# Altium PCB VariablePWMDriverPCB.PcbDoc
Units mm, origin at the board's own origin, x right, y up, seen from the top; angles counter-clockwise.
Board outline 22 x 22 mm, 2 copper layers (Top Layer, Bottom Layer); 8 components, 8 nets, 23 pads, 0 vias.
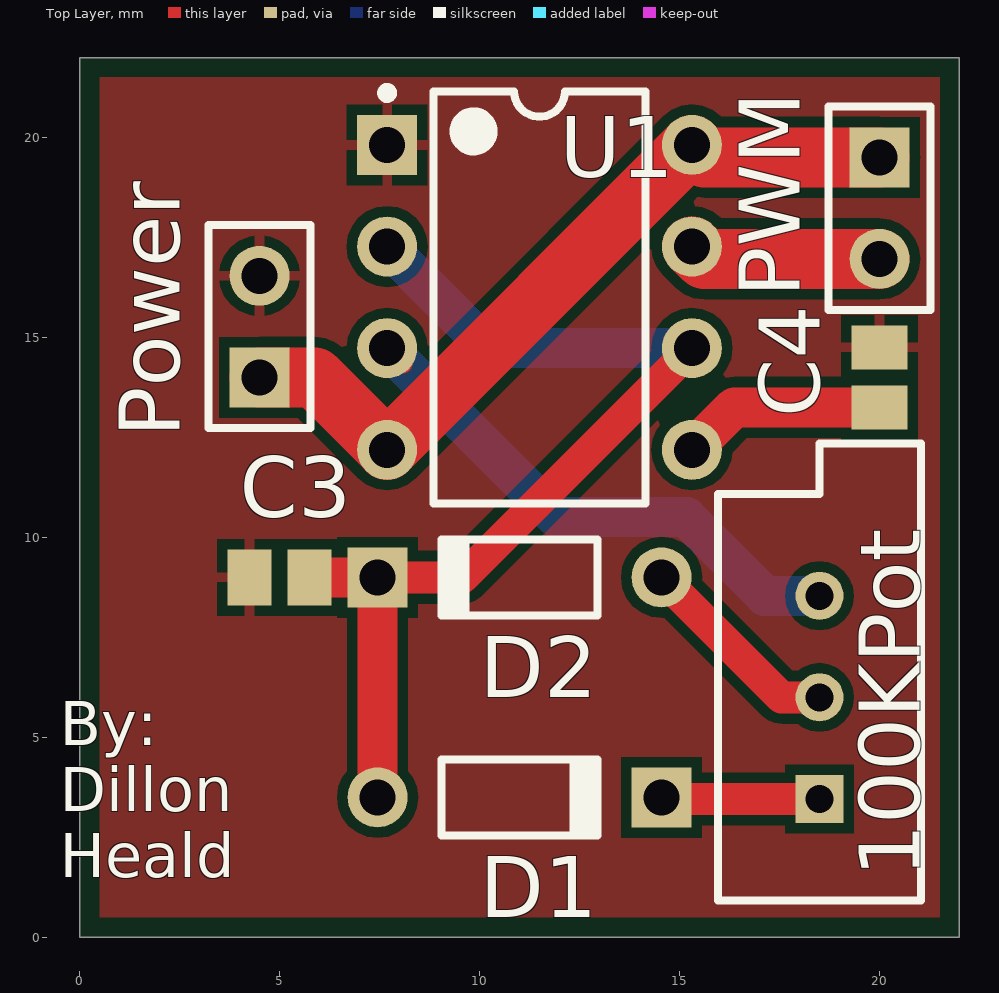
[diagram p0: Top Layer view]
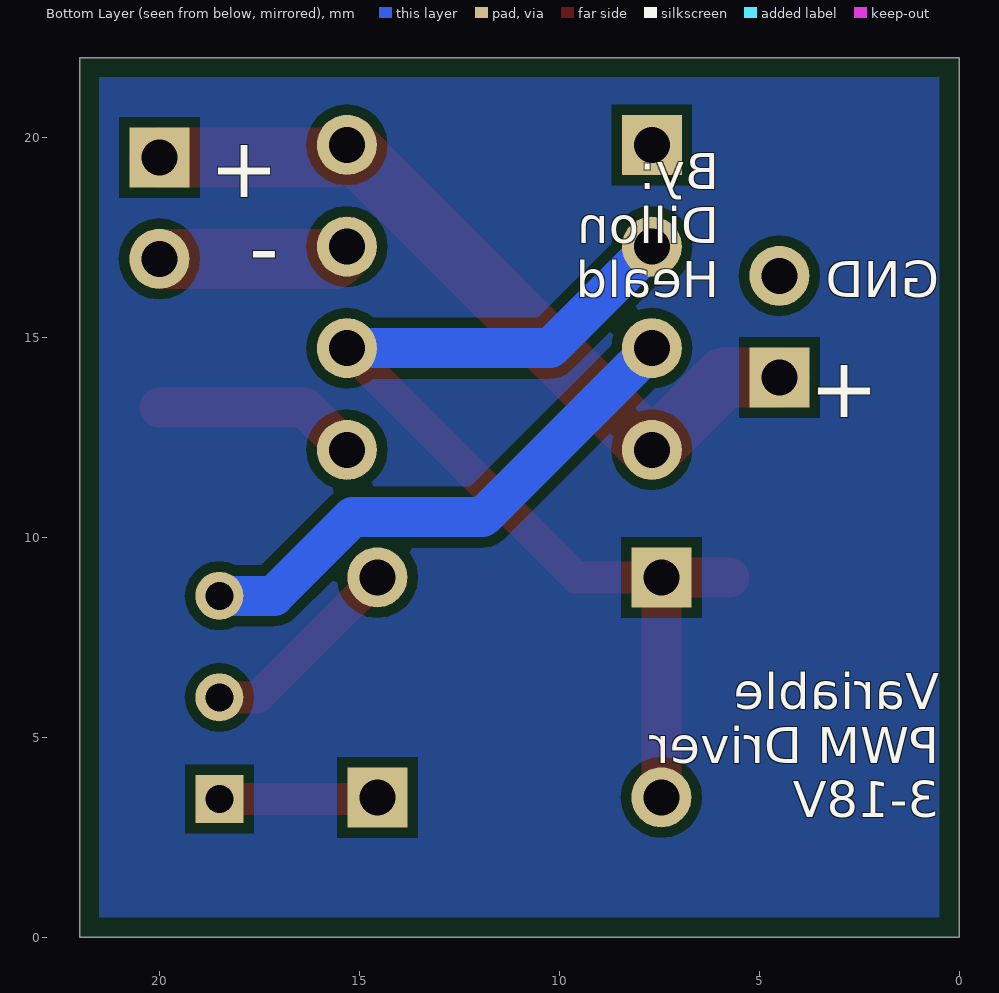
[diagram p1: Bottom Layer view, seen from below]

## Layer stack, top to bottom
Top Solder: solder mask 0.0102, Solder Resist, Dk 3.5
Top Layer: signal copper 0.0356
Dielectric 1: dielectric 0.32, FR-4, Dk 4.8
Bottom Layer: signal copper 0.0356
Bottom Solder: solder mask 0.0102, Solder Resist, Dk 3.5

## Board outline
0,0 21.996,0 21.996,21.996 0,21.996

## Design rules (kind name [scope] priority, off if disabled: settings)
Clearance [All] p1: gap=0.254
PolygonConnect [All] p1: connectstyle=Relief reliefconductorwidth=0.254 reliefentries=4 polygonreliefangle="90 Angle" airgapwidth=0.254
RoomDefinition VariablePWMDriverSchematic [InComponentClass('VariablePWMDriverSchematic')] p1: confinementstyle=ConfineIn formatcopy=TRUE lockcomponents=FALSE outline 0.5,0.5 21.5,0.5 21.5,21.5 0.5,21.5
RoutingVias [All] p1: holewidth=0.711 width=1.27 viastyle="Through Hole" minholewidth=0.711 minwidth=1.27 maxholewidth=0.711 maxwidth=1.27
SolderMaskExpansion [All] p1: expansion=0.102
Width [All] p1: maxlimit=1.5 minlimit=0.4 preferedwidth=1
30 further rules are at their usual default settings.

## Components (designator, comment, footprint, x,y, rotation, side; value= is the part's Value field where it differs from the comment)
100KPot "RPot" VR5 18.5,6 r90 top
C3 "Cap Pol3" C0805 5,9 r180 top
C4 "Cap Pol3" C0805 20,14 r90 top
D1 "Diode 1N4148" DO-35 11,3.5 r0 top
D2 "Diode 1N4148" DO-35 11,9 r180 top
Power "Header 2" HDR1X2 4.5,14 r90 top
PWM "Header 2" HDR1X2 20,19.5 r270 top
U1 "LM555CN/NOPB" N08E 11.5,16 r0 top

## Footprints (in the part's own frame and the unit in brackets; to place one, negate y for a bottom-side part, rotate by r counter-clockwise, add the part's x,y. Pads: shape width x height; smd on the part's side, far side on the other; paste and mask are expansions set on the pad)
C0805 [mm] "Chip Capacitor, Body 2.0x1.3mm, IPC High Density"
  rect 1.1x1.4 smd: 1(-0.75,0) 2(0.75,0)
  body extent -1.1,-0.72 1.1,0.72, height 1.4
DO-35 [mm] "Diode, Axial; Body 3.8 x 1.9 mm (LxDia. max), Lead Dia. 0.53 mm (max)"
  round 1.5 hole 0.9: 1(-3.55,0)
  rect 1.5x1.5 hole 0.9: 2(3.55,0)
  silkscreen extent -1.95,-0.95 2.05,0.95
HDR1X2 [mm] "Connector; Header; 2 Position"
  rect 1.5x1.5 hole 0.9: 1(0,0)
  round 1.5 hole 0.9: 2(2.54,0)
  silkscreen extent -1.27,-1.27 3.81,1.27
N08E [mm] "DIP, 8-Pin, Row Spacing 7.62 mm, Pitch 2.54 mm"
  rect 1.5x1.5 hole 0.9: 1(-3.81,3.81)
  round 1.5 hole 0.9: 2(-3.81,1.27) 3(-3.81,-1.27) 4(-3.81,-3.81) 5(3.81,-3.81) 6(3.81,-1.27) 7(3.81,1.27) 8(3.81,3.81)
  silkscreen extent -3.93,-5.15 2.65,5.23, body extent -3.6,-5.15 3.6,5.15, height 5.33
VR5 [mm] "Thru-Hole; 3 Leads"
  rect 1.2x1.2 hole 0.7: 1(-2.54,0)
  round 1.2 hole 0.7: 2(0,0) 3(2.54,0)
  silkscreen extent -5.08,-2.54 6.35,2.54

## Part data
100KPot: "Potentiometer"
C3 C4: "Polarized Capacitor (Surface Mount)"
D1 D2: "High Conductance Fast Diode"
Power PWM: "Header, 2-Pin"
U1: library part CMP-0056-00016-2, "Timer, 8-pin MDIP, Pb-Free"

## Nets (pads, with @x,y where several pads share a name; then routed paths per layer and width w, separated by ;. In a path a pad name is that pad's centre, name@x,y a point inside that pad or via, vN(x,y) a via of type N, cw(c..) or ccw(c..) an arc to the next point about the centre after c; other vN are vias at no path point)
GND: C3.2 C4.2 Power.2 U1.1
Net100KPot_1: 100KPot.1 D1.2 | length 3.9
  Top Layer w0.8: D1.2@14.59,3.46 100KPot.1
Net100KPot_2: 100KPot.2 D2.1 | length 5.2
  Top Layer w0.8: D2.1 17.55,6 100KPot.2
Net100KPot_3: 100KPot.3 U1.3 | length 13.9
  Top Layer w0.5: U1.3 U1.3@8.073,14.347
  Bottom Layer w1: U1.3 11.916,10.504 15.173,10.504 17.137,8.54 100KPot.3
NetC3_1: C3.1 D1.1 D2.2 U1.2 U1.6 | length 26.4
  Top Layer w0.8: D2.2 9.58,9 U1.6 ; U1.2@7.45,17.03 U1.2
  Top Layer w1: C3.1 D2.2 D1.1
  Bottom Layer w1: U1.2 10.23,14.73 U1.6
NetC4_1: C4.1 U1.5 | length 5.1
  Top Layer w1: U1.5 16.37,13.25 C4.1
NetPWM_2: PWM.2 U1.7 | length 4.8
  Top Layer w1.5: U1.7 15.62,16.96 PWM.2
VCC: Power.1 PWM.1 U1.4 U1.8 | length 19.5
  Top Layer w1.5: Power.1 5.88,14 U1.4 U1.8 15.62,19.5 PWM.1

## Polygon pours and split planes (outlines as drawn)
GND on Top Layer "Bottom Layer-No Net" (solid, pour order 0): 0.5,0.5 0.5,21.5 21.5,21.5 21.5,0.5 0.5,0.5
no net on Bottom Layer "Bottom Layer-No Net" (solid, pour order 2): 0.5,0.5 21.5,0.5 21.5,21.5 0.5,21.5 0.5,0.5

## Silkscreen, mask and mechanical layers (free items; w line width, h text height)
Top Overlay:
  text "By: / Dillon / Heald" at -0.5,1.5 h1.1
Bottom Overlay:
  text "+" at 17,18.5 h1.52
  text "-" at 17,16.5 h1.52
  text "GND" at 0.5,16 h0.9
  text "By:  / Dillon  / Heald" at 6,16 h0.9
  text "+" at 2,13 h1.52
  text "Variable / PWM Driver / 3-18V" at 0.5,3 h0.9
Mechanical 1:
  the board outline again, w0.254